# EAGLE board control_PCB_v20 (EAGLE 9.7.0)
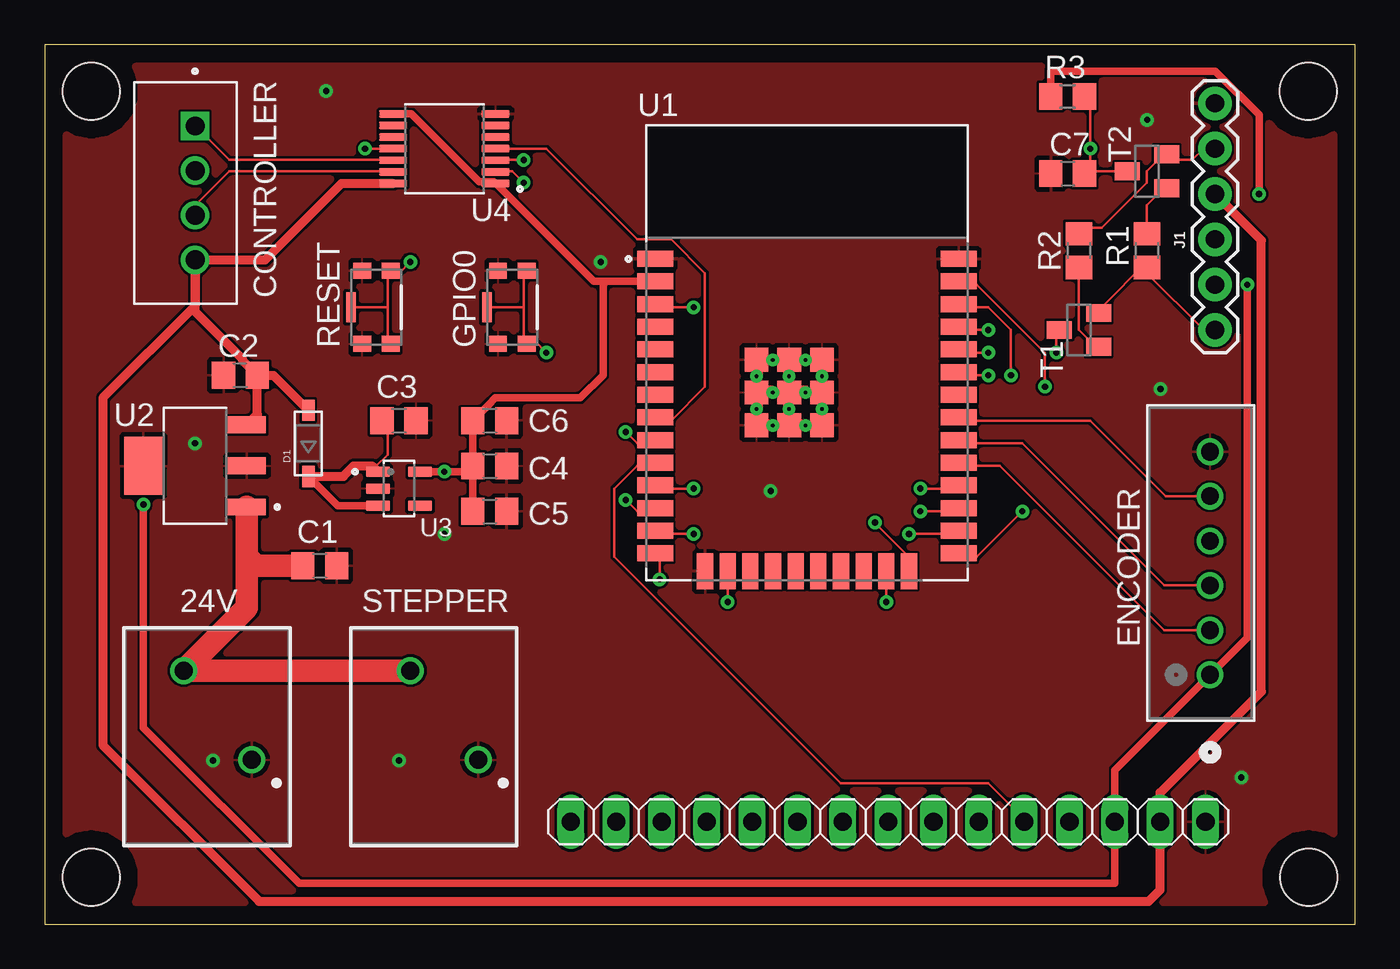
[diagram p0: board, top side]
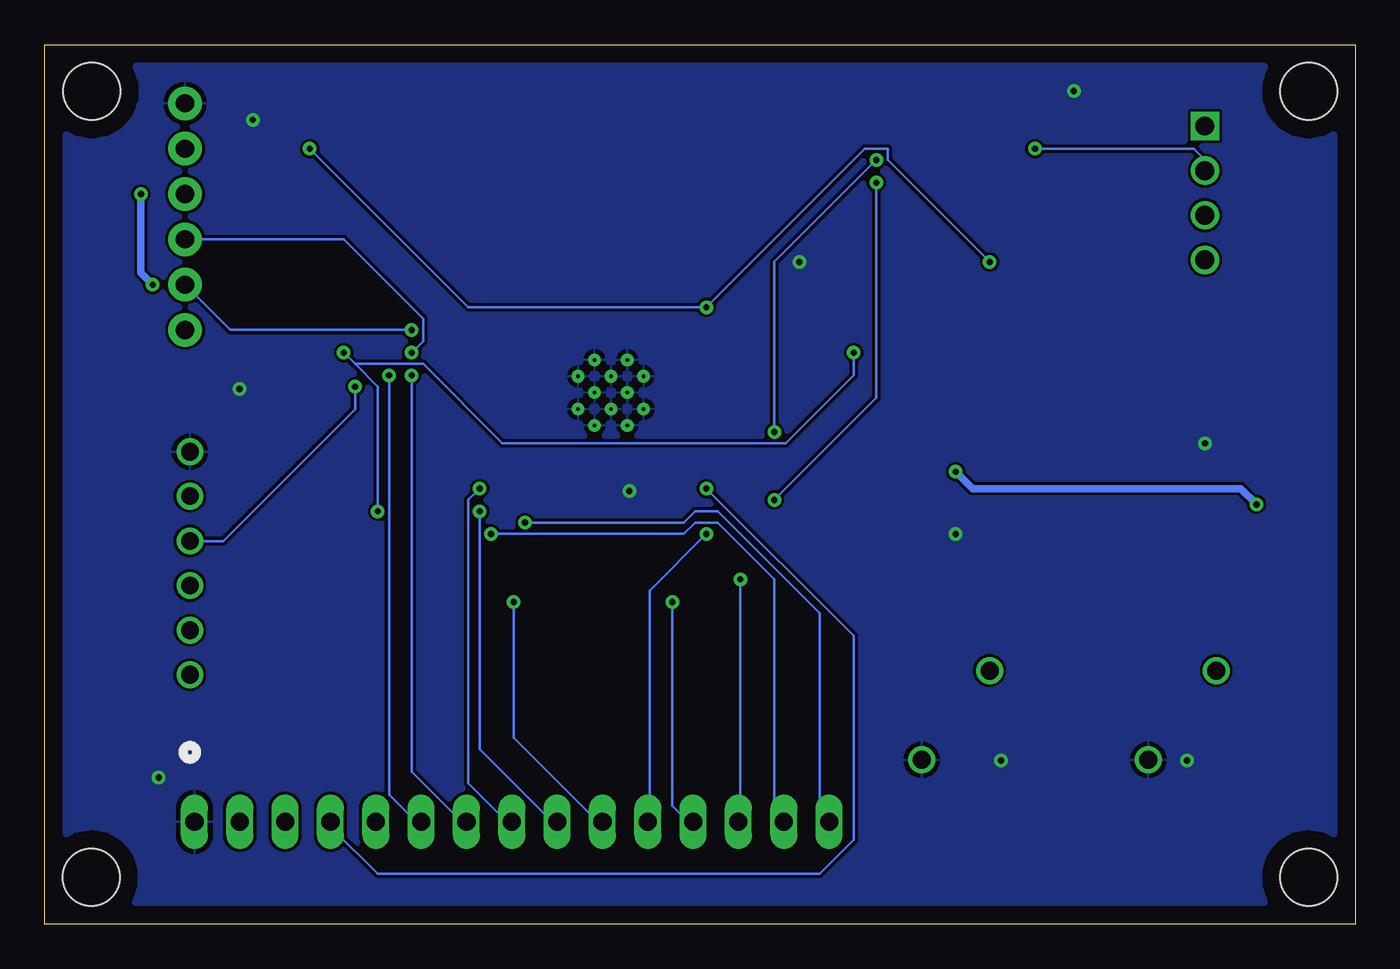
[diagram p1: board, bottom side, seen from below]

Size 73.45 x 49.28 mm. Coordinates in mm from the lower left corner, seen from the top.
Outline: 0,0 73.45,0 73.45,49.28 0,49.28 0,0
Copper layers (1*16): Top 0.035mm / dielectric 1.5mm / Bottom 0.035mm
Design rules "default *": minimum track width 6mil, minimum drill 0.35mm, track to track 6mil, track to pad 6mil, pad to pad 6mil, via to via 6mil, smd to smd 6mil, copper to edge 40mil, drill to drill 6mil, minimum pad ring 10mil, minimum via ring 8mil, stop-mask expansion 4mil, vias tented up to drill 0mil, thermal gap 10mil
Holes 3.2 mm at 2.62,46.66 2.62,2.62 70.83,2.62 70.8,46.66

## Footprints (pad centres in the part's own frame; a part is rotated, then mirrored left to right if it is on the bottom)
691412320002 = drill 1: 1 1.905,-2.5; 2 -1.905,2.5
C0805 = smd 1.3 x 1.5: 1 -0.95,0; 2 0.95,0
JST_B4B-XH-A(LF)(SN) = drill 1.06 square: 1 0,0 | drill 1.06: 2 2.5,0; 3 5,0; 4 7.5,0
SOD-123 = smd 1.2 x 0.7: A 1.85,0; C -1.85,0
CONN_B6B-XH-A_JST = drill 0.991 pad 1.499: 1 0,0; 2 2.489,0; 3 5.004,0; 4 7.493,0; 5 10.008,0; 6 12.497,0
SW_KMR221GLFS = smd 0.9 x 1: 1 -2.05,0.8; 2 -2.05,-0.8; 3 2.05,-0.8; 4 2.05,0.8 | smd 1.7 x 0.55: 5 0,1.425
FTDI_BASIC = drill 1.016 pad 1.88: CTS 10.16,0; DTR 0,0; GND 12.7,0; RXI 2.54,0; TXO 5.08,0; VCC 7.62,0
1X15 = drill 1.016 long: 1 -17.78,0; 2 -15.24,0; 3 -12.7,0; 4 -10.16,0; 5 -7.62,0; 6 -5.08,0; 7 -2.54,0; 8 0,0; 9 2.54,0; 10 5.08,0; 11 7.62,0; 12 10.16,0; 13 12.7,0; 14 15.24,0; 15 17.78,0
R0805 = smd 1.3 x 1.5: 1 -0.95,0; 2 0.95,0
SOT23-BEC = smd 1 x 1.4: B -0.95,-1.1; C 0,1.1; E 0.95,-1.1
MODULE_ESP32-WROOM-32 = smd 2 x 0.9: 1 -8.5,5.26; 2 -8.5,3.99; 3 -8.5,2.72; 4 -8.5,1.45; 5 -8.5,0.18; 6 -8.5,-1.09; 7 -8.5,-2.36; 8 -8.5,-3.63; 9 -8.5,-4.9; 10 -8.5,-6.17; 11 -8.5,-7.44; 12 -8.5,-8.71; 13 -8.5,-9.98; 14 -8.5,-11.25; 25 8.5,-11.25; 26 8.5,-9.98; 27 8.5,-8.71; 28 8.5,-7.44; 29 8.5,-6.17; 30 8.5,-4.9; 31 8.5,-3.63; 32 8.5,-2.36; 33 8.5,-1.09; 34 8.5,0.18; 35 8.5,1.45; 36 8.5,2.72; 37 8.5,3.99; 38 8.5,5.26 | smd 0.9 x 2: 15 -5.715,-12.25; 16 -4.445,-12.25; 17 -3.175,-12.25; 18 -1.905,-12.25; 19 -0.635,-12.25; 20 0.635,-12.25; 21 1.905,-12.25; 22 3.175,-12.25; 23 4.445,-12.25; 24 5.715,-12.25 | smd 1.33 x 1.33: 39_1 -2.835,-0.405; 39_2 -1,-0.405; 39_3 0.835,-0.405; 39_4 -2.835,-2.24; 39_5 -1,-2.24; 39_6 0.835,-2.24; 39_7 -2.835,-4.075; 39_8 -1,-4.075; 39_9 0.835,-4.075 | drill 0.2 pad 0.3: 39_10 -1.917,-0.405; 39_11 -0.083,-0.405; 39_12 -2.835,-1.323; 39_13 -1,-1.323; 39_14 0.835,-1.323; 39_15 -1.917,-2.24; 39_16 -0.083,-2.24; 39_17 -2.835,-3.158; 39_18 -1,-3.158; 39_19 0.835,-3.158; 39_20 -1.917,-4.075; 39_21 -0.083,-4.075
SOT230P700X180-4N = smd 2.15 x 0.95: 1 -2.9,2.3; 2 -2.9,0; 3 -2.9,-2.3 | smd 2.15 x 3.25: 4 2.9,0
SOT95P285X140-5N = smd 1.35 x 0.6: 1 -1.185,0.95; 2 -1.185,0; 3 -1.185,-0.95; 4 1.185,-0.95; 5 1.185,0.95
SOP65P640X120-14N = smd 1.57 x 0.41: 1 -2.87,1.95; 2 -2.87,1.3; 3 -2.87,0.65; 4 -2.87,0; 5 -2.87,-0.65; 6 -2.87,-1.3; 7 -2.87,-1.95; 8 2.87,-1.95; 9 2.87,-1.3; 10 2.87,-0.65; 11 2.87,0; 12 2.87,0.65; 13 2.87,1.3; 14 2.87,1.95

## Placement (x,y rotation side)
24V  691412320002  [691412320002]  9.7,11.7 0 top
C1  0.47 µF  [C0805]  15.42,20.08 0 top
C2  22 µF  [C0805]  10.97,30.75 180 top
C3  10 µF  [C0805]  19.86,28.21 0 top
C4  10 µF  [C0805]  24.94,25.67 0 top
C5  10 µF  [C0805]  24.94,23.13 0 top
C6  10 µF  [C0805]  24.94,28.21 0 top
C7  1 µF  [C0805]  57.32,42.05 0 top
CONTROLLER  B4B-XH-A(LF)(SN)  [JST_B4B-XH-A(LF)(SN)]  8.43,44.72 270 top
D1  [SOD-123]  14.78,26.94 90 top
ENCODER  B6B-XH-A_(LF)(SN)  [CONN_B6B-XH-A_JST]  65.31,13.97 90 top
GPIO0  KMR221GLFS  [SW_KMR221GLFS]  26.21,34.56 90 top
J1  6_PIN_SERIAL_CABLEPTH  [FTDI_BASIC]  65.58,33.29 90 top
JP2  PINHD-1X15  [1X15]  47.27,5.73 0 top
R1  10K  [R0805]  61.77,37.73 90 top
R2  10K  [R0805]  57.96,37.73 270 top
R3  10K  [R0805]  57.32,46.37 180 top
RESET  KMR221GLFS  [SW_KMR221GLFS]  18.59,34.56 90 top
STEPPER  691412320002  [691412320002]  22.4,11.7 0 top
T1  [SOT23-BEC]  57.96,33.29 90 top
T2  [SOT23-BEC]  61.77,42.18 90 top
U1  ESP32-WROOM-32  [MODULE_ESP32-WROOM-32]  42.72,32.02 0 top
U2  LM2940IMP-5.0  [SOT230P700X180-4N]  8.43,25.67 180 top
U3  AP2112K-3.3TRG1  [SOT95P285X140-5N]  19.86,24.4 0 top
U4  LSF0204DPWR  [SOP65P640X120-14N]  22.4,43.45 180 top

## Library data of the parts
24V STEPPER = 691412320002; DESCRIPTION: 2 Position Wire to Board Terminal Block 45° (135°) Angle with Board 0.150 (3.81mm) Through Hole, Kinked Pin; DIGIKEY-PURCHASE-URL: https://snapeda.com/shop?store=DigiKey&id=2886139; MF: Wurth Electronics; MOUSER-PURCHASE-URL: https://snapeda.com/shop?store=Mouser&id=2886139; MP: 691412320002; PACKAGE: None
C1-C7 = rcl; SPICEPREFIX: C
CONTROLLER = B4B-XH-A_LF__SN_; DESCRIPTION: Connector Header Through Hole 4 position 0.098 (2.50mm); DIGI-KEY_PART_NUMBER: 455-2249-ND; DIGIKEY-PURCHASE-URL: https://snapeda.com/shop?store=DigiKey&id=447494; MF: JST Sales; MP: B4B-XH-A(LF)(SN); PACKAGE: None
D1 = adafruit
ENCODER = B6B-XH-A_LF__SN_; BUILT_BY: EMA_Cory; COPYRIGHT: Copyright (C) 2018 Accelerated Designs. All rights reserved; DATASHEET: http://www.jst-mfg.com/product/pdf/eng/eXH.pdf; MANUFACTURER_PART_NUMBER: B6B-XH-A (LF)(SN); SOURCELIBRARY: JST_2020-07-08; VENDOR: JST
GPIO0 RESET = KMR221GLFS; ARROW_ELECTRONICS-PURCHASE-URL: https://snapeda.com/shop?store=Arrow+Electronics&id=347724; DESCRIPTION: Tactile Switch SPST-NO Top Actuated Surface Mount; DIGI-KEY_PART_NUMBER: 401-1427-1-ND; DIGIKEY-PURCHASE-URL: https://snapeda.com/shop?store=DigiKey&id=347724; MF: C&K; MOUSER-PURCHASE-URL: https://snapeda.com/shop?store=Mouser&id=347724; MP: KMR221GLFS; PACKAGE: None
J1 = SparkFun-Connectors
JP2 = Connector; CATEGORY: CONNECTOR; SUB-CATEGORY: PIN-HEADER
R1-R3 = rcl; SPICEPREFIX: R
T1 T2 = transistor
U1 = ESP32-WROOM-32; DESCRIPTION: Bluetooth, WiFi Transceiver Module 2.4GHz ~ 2.5GHz Surface Mount; DIGI-KEY_PART_NUMBER: 1904-1010-1-ND; MF: Espressif Systems; MP: ESP32-WROOM-32; PACKAGE: Module Espressif Systems
U2 = LM2940IMP-5.0; DESCRIPTION: 1-A, 26-V, high-PSRR, low-dropout voltage regulator 4-SOT-223 -40 to 85; DIGI-KEY_PART_NUMBER: LM2940IMP-5.0/NOPBCT-ND; DIGIKEY-PURCHASE-URL: https://snapeda.com/shop?store=DigiKey&id=18138; MF: Texas Instruments; MOUSER-PURCHASE-URL: https://snapeda.com/shop?store=Mouser&id=18138; MP: LM2940IMP-5.0/NOPB; PACKAGE: SOT-223-4 Texas Instruments; TEXAS_INSTRUMENTS-PURCHASE-URL: https://snapeda.com/shop?store=Texas+Instruments&id=18138
U3 = AP2112K-3.3TRG1; DESCRIPTION: Linear Voltage Regulator IC 1 Output 600mA SOT-25; DIGI-KEY_PART_NUMBER: AP2112K-3.3TRG1DICT-ND; DIGIKEY-PURCHASE-URL: https://snapeda.com/shop?store=DigiKey&id=454988; MF: Diodes Inc.; MOUSER-PURCHASE-URL: https://snapeda.com/shop?store=Mouser&id=454988; MP: AP2112K-3.3TRG1; PACKAGE: SOT-753 Diodes Inc.
U4 = LSF0204DPWR; DESCRIPTION: 4-Bit Bidirectional Multi-Voltage Level Translator for Open-Drain & Push-Pull 14-TSSOP -40 to 125; DIGI-KEY_PART_NUMBER: 296-40400-1-ND; MF: Texas Instruments; MOUSER-PURCHASE-URL: https://snapeda.com/shop?store=Mouser&id=377950; MP: LSF0204DPWR; PACKAGE: TSSOP-14 Texas Instruments; TEXAS_INSTRUMENTS-PURCHASE-URL: https://snapeda.com/shop?store=Texas+Instruments&id=377950

## Nets
+3V3: C4.1 C5.1 C6.1 ENCODER.1 JP2.13 R3.2 U1.2 U3.5 U4.1 U4.8
+5V: C2.1 CONTROLLER.4 D1.A J1.VCC JP2.14 U2.3 U4.14
+24V: 24V.2 C1.1 STEPPER.2 U2.1
CLK: ENCODER.3 U1.30
CS: ENCODER.2 U1.29
DIR_3.3: U1.8 U4.4
DIR_5: CONTROLLER.2 U4.11
DTR: J1.DTR R1.1 T1.E
EN_3.3: U1.12 U4.2
EN_5: CONTROLLER.3 U4.13
GND: 24V.1 C1.2 C2.2 C3.2 C4.2 C5.2 C6.2 C7.1 ENCODER.6 GPIO0.1 GPIO0.4 J1.GND JP2.15 RESET.1 RESET.4 STEPPER.1 U1.1 U1.15 U1.38 U1.39_1 U1.39_2 U1.39_3 U1.39_4 U1.39_5 U1.39_6 U1.39_7 U1.39_8 U1.39_9 U1.39_10 U1.39_11 U1.39_12 U1.39_13 U1.39_14 U1.39_15 U1.39_16 U1.39_17 U1.39_18 U1.39_19 U1.39_20 U1.39_21 U2.2 U2.4 U3.2 U4.7
GPIO0: GPIO0.2 GPIO0.3 GPIO0.5 T1.C U1.25
GPIO2: JP2.1 U1.24
GPIO4: JP2.2 U1.26
GPIO12: JP2.3 U1.14
GPIO13: JP2.4 U1.16
GPIO14: JP2.5 U1.13
GPIO15: JP2.6 U1.23
GPIO16: JP2.7 U1.27
GPIO17: JP2.8 U1.28
GPIO21: JP2.9 U1.33
GPIO22: JP2.10 U1.36
GPIO25: JP2.11 U1.10
GPIO26: JP2.12 U1.11
MISO: ENCODER.5 U1.31
MOSI: ENCODER.4 U1.37
N$1: C3.1 D1.C U3.1 U3.3
N$8: R1.2 T2.B
N$9: R2.2 T1.B
RESET: C7.2 R3.1 RESET.2 RESET.3 RESET.5 T2.C U1.3
RTS: J1.CTS R2.1 T2.E
RXD: J1.TXO U1.34
STEP_3.3: U1.9 U4.3
STEP_5: CONTROLLER.1 U4.12
TXD: J1.RXI U1.35

## Tracks (layer width: path | path; a pad name or v marks a point on that pad's centre or on a via)
+3V3  (via drill 0.35)
  Top 0.406: U3.5 v22.4,25.35 23.67,25.35 C4.1 | C4.1 C6.1 24.88,29.1 24.88,29.11 25.26,29.48 30.02,29.48 31.29,30.75 31.29,35.83 31.47,36.01 | C4.1 C5.1 | 31.47,36.01 30.76,36.01 U4.1 25.18,41.59 24.37,41.59 20.56,45.4 U4.8 | R3.2 56.38,47.8 65.6,47.8 68.06,45.35 v68.06,40.91 | 31.47,36.01 U1.2 | v5.54,23.51 5.54,11.01 14.27,2.28 59.97,2.28 JP2.13 59.97,8.63 ENCODER.1 67.39,16.05 v67.39,35.83
  Bottom 0.406: v22.4,25.35 21.45,24.4 6.43,24.4 v5.54,23.51 | v67.39,35.83 68.06,36.49 v68.06,40.91
+5V
  Top 0.508: U2.3 11.92,28.56 C2.1 | C2.1 12.82,30.75 D1.A | C2.1 11.08,31.59 11.08,31.67 8.43,34.31 CONTROLLER.4 | CONTROLLER.4 12.36,37.22 16.64,41.5 U4.14 | CONTROLLER.4 8.43,34.64 3.27,29.48 3.27,10.02 12.02,1.27 61.86,1.27 62.51,1.92 JP2.14 62.51,7.36 68.18,13.03 68.18,38.31 J1.VCC
+24V
  Top 1.27: STEPPER.2 24V.2 11.33,17.73 11.33,20.59 | 11.33,20.59 U2.1 | 11.33,20.59 11.84,20.08 C1.1
CLK
  Top 0.152: U1.30 51.61,26.94 54.78,26.94 62.75,18.97 ENCODER.3
CS
  Top 0.152: U1.29 51.61,25.67 53.52,25.67 62.73,16.46 ENCODER.2
DIR_3.3
  Top 0.152: U4.4 28.12,43.45 33.2,38.37 35.1,38.37 37,36.47 37,30.11 35.1,28.21 34.46,28.21 U1.8
DIR_5  (via drill 0.35)
  Top 0.152: v17.95,43.45 U4.11
  Bottom 0.152: v17.95,43.45 9.07,43.45 8.43,42.81 CONTROLLER.2
DTR
  Top 0.152: T1.E 59.23,34.56 61.77,37.1 R1.1 61.77,36.47 64.95,33.29 J1.DTR
EN_3.3  (via drill 0.35)
  Top 0.152: v26.84,41.55 26.21,42.18 25.58,42.18 U4.2 | v32.56,23.77 33.2,23.13 33.83,23.13 U1.12
  Bottom 0.152: v26.84,41.55 26.84,29.48 v32.56,23.77
EN_5
  Top 0.152: U4.13 19.23,42.18 10.34,42.18 8.43,40.28 CONTROLLER.3
GND  (via drill 0.35)
  Top 0.152: U1.39_16 42.72,30.11 42.09,30.11 U1.39_5 41.45,29.48 41.45,28.84 | U1.39_20 40.81,28.21 40.18,28.21 U1.39_7 | 43.35,31.39 42.72,31.39 U1.39_11 | U1.39_21 42.72,28.21 42.09,28.21 U1.39_8 41.45,28.21 41.45,28.84 | U1.39_17 40.18,28.84 40.18,29.48 U1.39_4 40.18,30.11 40.81,30.11 U1.39_15 | 40.18,31.39 40.18,30.75 U1.39_12 | U1.39_13 41.45,30.75 41.45,31.39 U1.39_2 | U1.39_19 43.35,28.84 43.35,29.48 U1.39_6 | 43.35,31.39 43.35,30.75 U1.39_14 | 43.35,31.39 U1.39_3 | 40.18,31.39 40.81,31.39 U1.39_10 | 40.18,31.39 U1.39_1 | 41.45,28.84 U1.39_18
  other vias: 22.4,21.86 8.43,26.94 9.43,9.16 19.86,9.16 40.69,24.27 31.16,37.1 62.53,29.99 61.79,45.07 15.78,46.67 67.06,8.21
  pour Top: -4.27,53.61 75.74,53.61 75.74,-2.27 -3,-2.27 -4.27,-1
  pour Bottom: -5.54,54.61 75.74,54.61 75.74,-2.27 -5.54,-2.27
GPIO0  (via drill 0.35)
  Top 0.152: 26.84,34.56 26.84,36.47 GPIO0.3 | 26.84,34.56 26.84,32.66 GPIO0.2 27.48,32.66 v28.12,32.02 | 26.84,34.56 GPIO0.5 | v56.69,32.02 56.69,33.29 T1.C | v54.78,23.13 52.24,20.59 51.61,20.59 U1.25
  Bottom 0.152: 56.05,31.39 54.78,30.11 v54.78,23.13 | 56.05,31.39 v56.69,32.02 | v28.12,32.02 28.12,30.75 31.92,26.94 47.8,26.94 52.24,31.39 56.05,31.39
GPIO2  (via drill 0.35)
  Top 0.152: U1.24 48.43,20.59 v46.53,22.5
  Bottom 0.152: v46.53,22.5 37.64,22.5 37,23.13 35.73,23.13 30.02,17.41 30.02,5.98 JP2.1
GPIO4  (via drill 0.35)
  Top 0.152: v48.43,21.86 50.98,21.86 U1.26
  Bottom 0.152: v48.43,21.86 37.64,21.86 37,22.5 35.73,22.5 32.56,19.32 32.56,5.98 JP2.2
GPIO12  (via drill 0.35)
  Top 0.152: v34.46,19.32 34.46,20.59 U1.14
  Bottom 0.152: v34.46,19.32 34.46,5.98 JP2.3
GPIO13  (via drill 0.35)
  Top 0.152: v38.27,18.05 U1.16
  Bottom 0.152: v38.27,18.05 38.27,6.62 37.64,5.98 JP2.4
GPIO14  (via drill 0.35)
  Top 0.152: v36.37,21.86 34.46,21.86 U1.13
  Bottom 0.152: v36.37,21.86 39.55,18.69 39.55,5.98 JP2.5
GPIO15  (via drill 0.35)
  Top 0.152: v47.16,18.05 U1.23
  Bottom 0.152: v47.16,18.05 47.16,10.43 42.72,5.98 JP2.6
GPIO16  (via drill 0.35)
  Top 0.152: v49.07,23.13 50.98,23.13 U1.27
  Bottom 0.152: v49.07,23.13 49.07,9.8 45.26,5.98 JP2.7
GPIO17  (via drill 0.35)
  Top 0.152: v49.07,24.4 50.98,24.4 U1.28
  Bottom 0.152: v49.07,24.4 49.7,23.77 49.7,7.89 47.8,5.98 JP2.8
GPIO21  (via drill 0.35)
  Top 0.152: v52.88,30.75 51.61,30.75 U1.33
  Bottom 0.152: v52.88,30.75 52.88,8.52 50.34,5.98 JP2.9
GPIO22  (via drill 0.35)
  Top 0.152: v54.15,30.75 54.15,33.29 52.88,34.56 51.61,34.56 U1.36
  Bottom 0.152: v54.15,30.75 54.15,7.25 52.88,5.98 JP2.10
GPIO25
  Top 0.152: U1.10 33.83,25.67 33.2,25.67 31.92,24.4 31.92,20.59 44.62,7.89 52.88,7.89 54.78,5.98 JP2.11
GPIO26  (via drill 0.35)
  Top 0.152: v36.37,24.4 34.46,24.4 U1.11
  Bottom 0.152: v36.37,24.4 28.12,16.14 28.12,4.71 30.02,2.81 54.78,2.81 57.32,5.35 JP2.12
MISO
  Top 0.152: U1.31 51.61,28.21 58.59,28.21 62.83,23.98 ENCODER.5
MOSI  (via drill 0.35)
  Top 0.152: v56.05,30.11 56.05,32.02 52.24,35.83 51.61,35.83 U1.37
  Bottom 0.152: v56.05,30.11 56.05,28.84 63.44,21.46 ENCODER.4
N$1
  Top 0.152: C3.1 19.23,28.21 19.23,26.3 18.59,25.67 18.35,25.67
  Top 0.406: D1.C 16.42,23.45 U3.3
  Top 0.508: D1.C 16.74,25.09 17.32,25.67 18.35,25.67 U3.1
N$8
  Top 0.152: R1.2 61.77,40.28 62.41,40.91 T2.B
N$9
  Top 0.152: R2.2 57.96,33.29 58.59,32.66 T1.B
RESET  (via drill 0.35)
  Top 0.152: 19.23,34.56 19.23,36.47 RESET.3 19.86,36.47 v20.49,37.1 | 19.23,34.56 19.23,32.66 RESET.2 | 19.23,34.56 RESET.5 | 58.59,42.18 T2.C | 58.59,42.18 v58.59,43.45 58.59,45.99 R3.1 | 58.59,42.18 C7.2 | v36.37,34.56 34.46,34.56 U1.3
  Bottom 0.152: v58.59,43.45 49.7,34.56 v36.37,34.56 27.48,43.45 26.21,43.45 26.21,42.81 v20.49,37.1
RTS
  Top 0.152: J1.CTS 64.95,43.45 64.31,42.81 63.04,42.81 T2.E 62.41,42.81 61.77,42.18 61.77,41.55 59.23,39 57.96,39 R2.1
RXD  (via drill 0.35)
  Top 0.152: v52.88,32.02 51.61,32.02 U1.34
  Bottom 0.152: v52.88,32.02 52.24,32.66 52.24,33.92 56.69,38.37 J1.TXO
STEP_3.3  (via drill 0.35)
  Top 0.152: v26.84,42.81 25.58,42.81 U4.3 | v32.56,27.58 33.2,26.94 33.83,26.94 U1.9
  Bottom 0.152: v26.84,42.81 32.56,37.1 v32.56,27.58
STEP_5
  Top 0.152: CONTROLLER.1 10.34,42.81 19.23,42.81 U4.12
TXD  (via drill 0.35)
  Top 0.152: v52.88,33.29 51.61,33.29 U1.35
  Bottom 0.152: v52.88,33.29 63.04,33.29 J1.RXI